# Altium PCB Machnguon24Vin12Vout.PcbDoc
Units mm, origin at the board's own origin, x right, y up, seen from the top; angles counter-clockwise.
Board outline 92.46 x 50.29 mm, 2 copper layers (Top Layer, Bottom Layer); 40 components, 21 nets, 97 pads, 43 vias.
Unrouted connection lines stored in the file: 56.
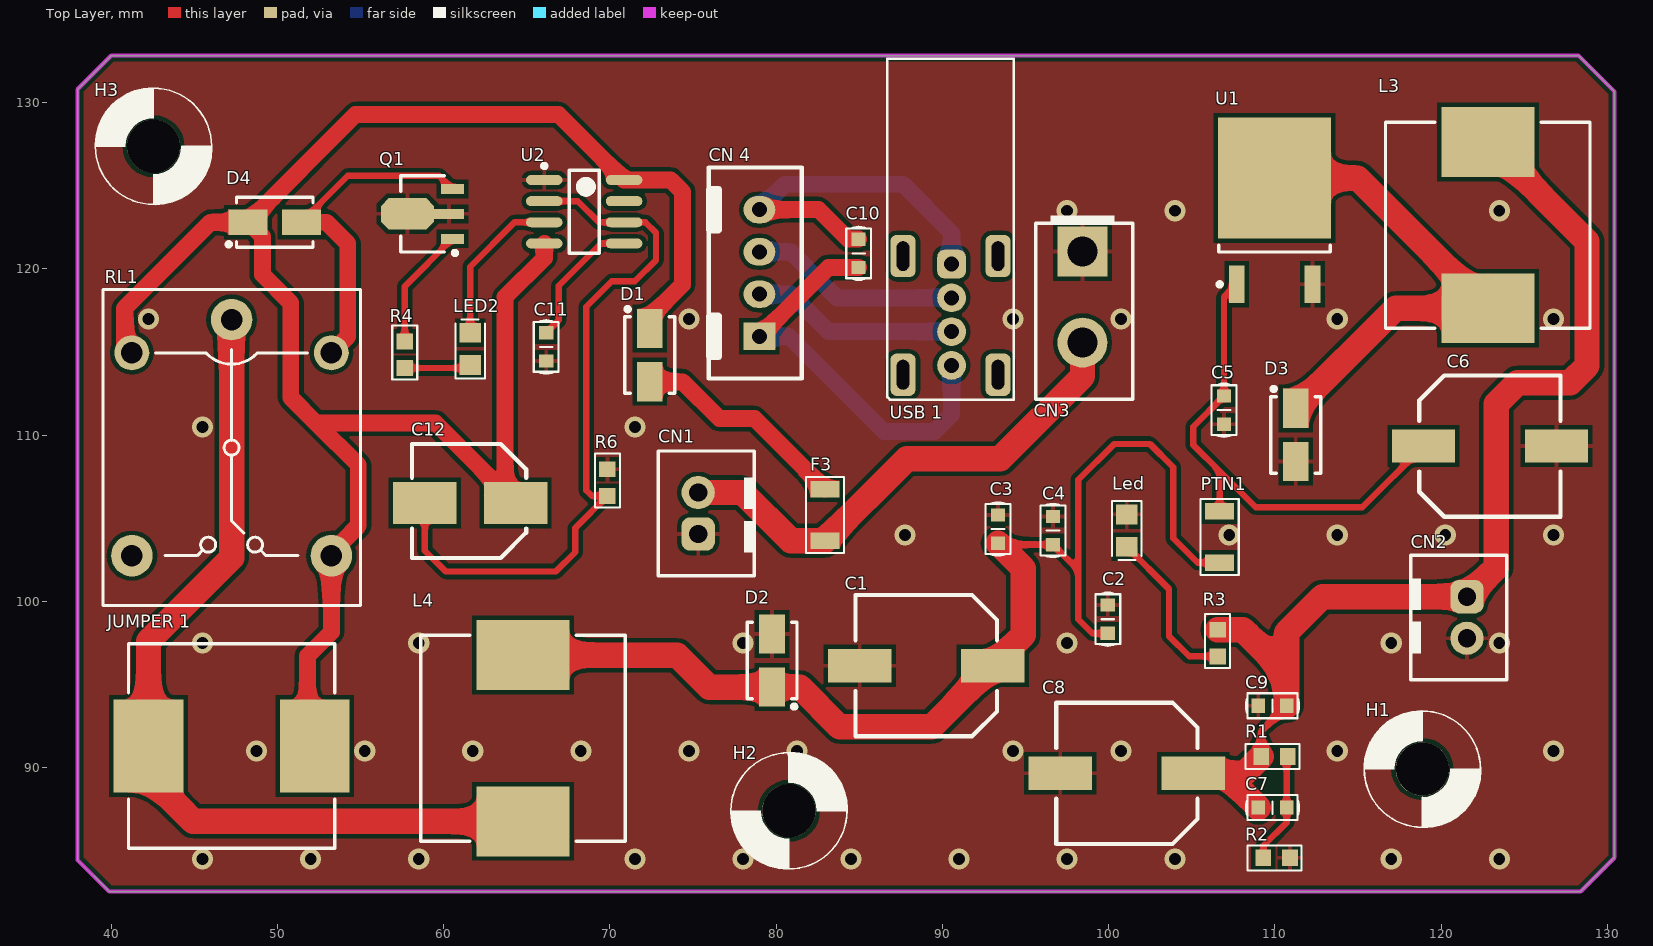
[diagram p0: Top Layer view]
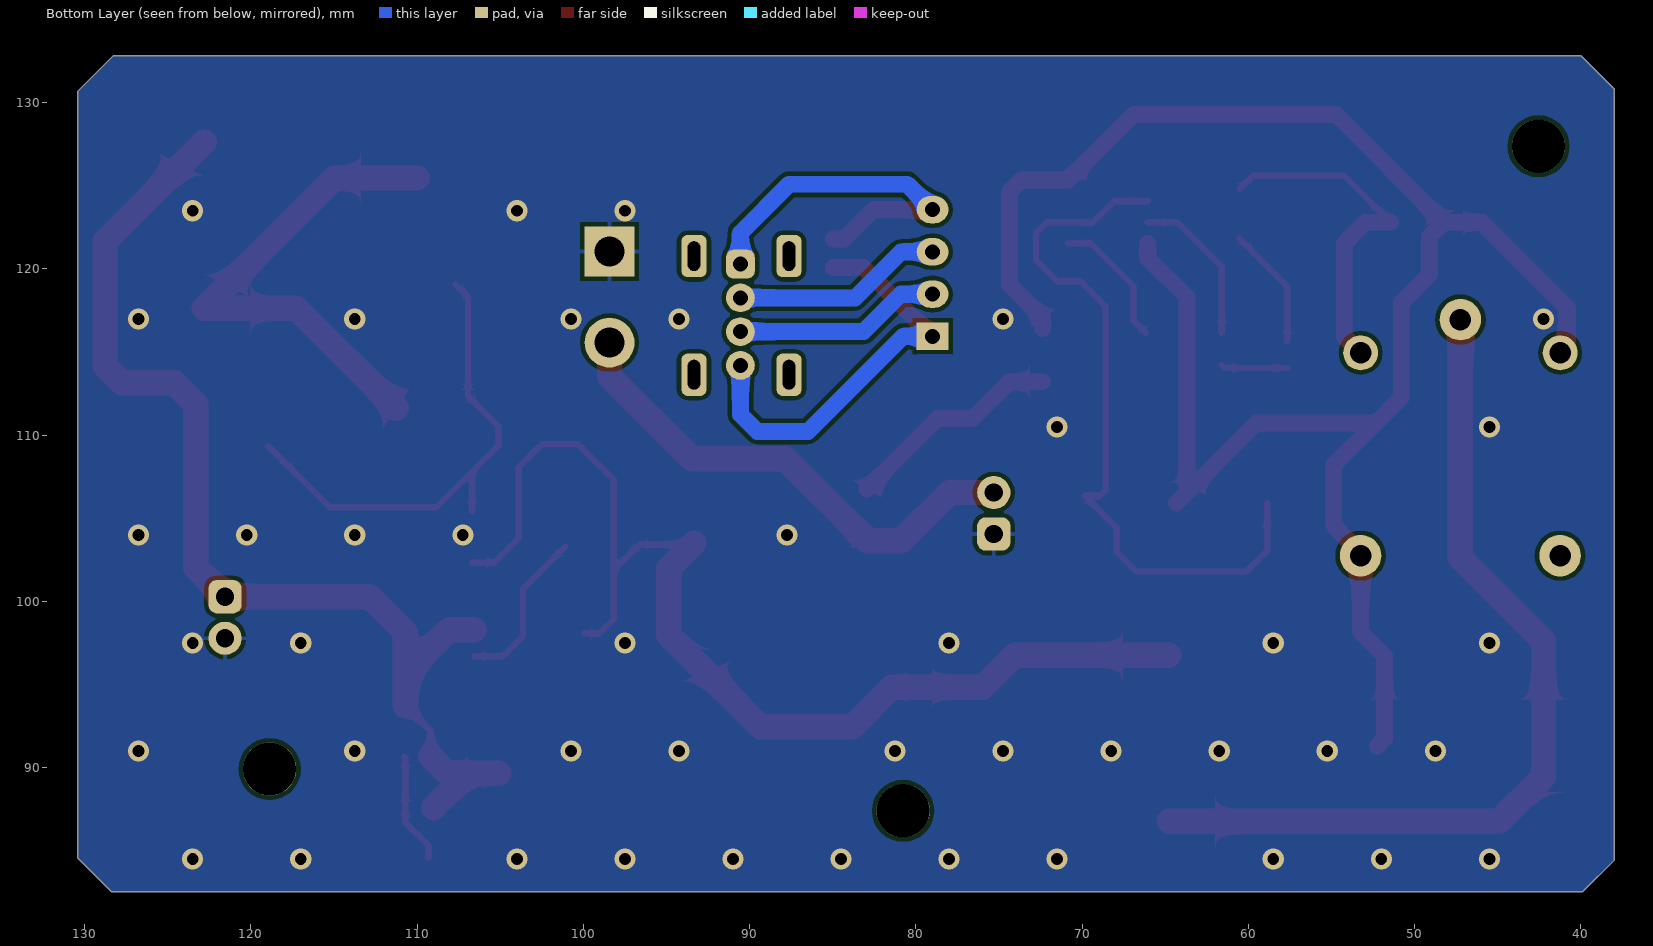
[diagram p1: Bottom Layer view, seen from below]
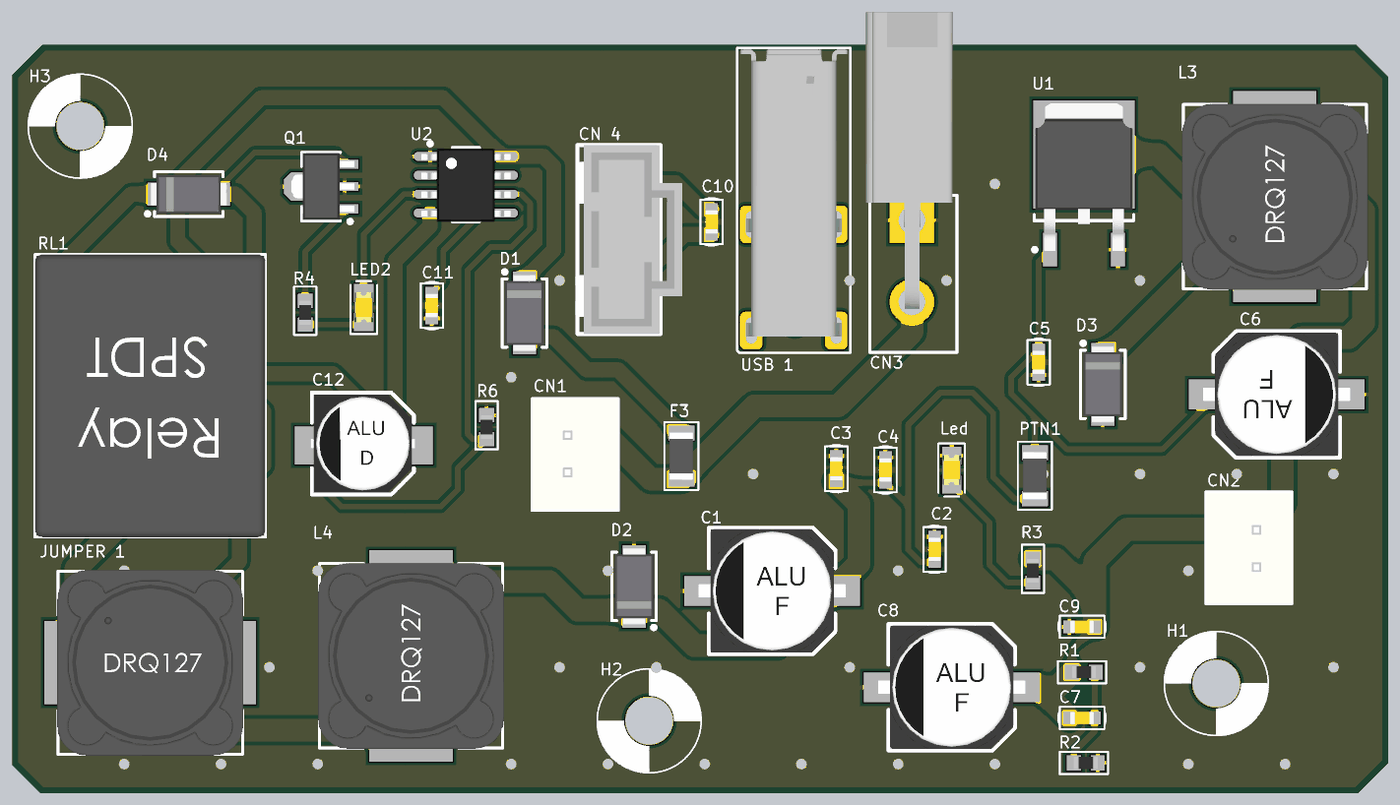
[diagram p2: 3D render of the assembled board from above, using the file's embedded part models]

## Layer stack, top to bottom
Top Solder: solder mask 0.0102, Solder Resist, Dk 3.5
Top Layer: signal copper 0.0356
Dielectric 1: dielectric 0.32, FR-4, Dk 4.8
Bottom Layer: signal copper 0.0356
Bottom Solder: solder mask 0.0102, Solder Resist, Dk 3.5

## Board outline
39.878,82.55 37.973,84.455 37.973,130.81 40.005,132.842 128.27,132.842 130.429,130.683 130.429,84.582 128.397,82.55

## Design rules (kind name [scope] priority, off if disabled: settings)
Clearance [All] p1: gap=0.254 ignorepadtopadclearanceinfootprint=FALSE except(0: Arc-Hole Track-Hole SMDPad-Hole THPad-Hole Via-Hole Fill-Hole Poly-Hole Region-Hole Text-Hole)
PolygonConnect [All] p1: connectstyle=Relief reliefconductorwidth=0.254 reliefentries=4 polygonreliefangle="90 Angle" airgapwidth=0.254
RoutingVias [All] p1: holewidth=0.711 width=1.27 viastyle="Through Hole" minholewidth=0.711 minwidth=1.27 maxholewidth=0.711 maxwidth=1.27
SolderMaskExpansion [All] p1: expansion=0.102
Width [All] p1: maxlimit=0.254 minlimit=0.254 preferedwidth=0.254
30 further rules are at their usual default settings.

## Components (designator, comment, footprint, x,y, rotation, side; value= is the part's Value field where it differs from the comment)
C1 "470/25" "C SMD ALU (F)" 89.027,96.139 r180 top
C2 "104/50V" "C 0603" 99.949,98.933 r90 top
C3 "102/50" "C 0603" 93.345,104.355 r90 top
C4 "10P/50V" "C 0603" 96.647,104.267 r90 top
C5 "104" "C 0603" 106.941,111.506 r270 top
C6 "470/25" "C SMD ALU (F)" 122.936,109.347 r0 top
C7 "104" "C 0603" 109.855,87.598 r0 top
C8 "220/25" "C SMD ALU (F)" 101.092,89.662 r180 top
C9 "104" "C 0603" 109.855,93.726 r180 top
C10 "104" "C 0603" 84.963,120.943 r90 top
C11 "102" "C 0603" 66.167,115.316 r270 top
C12 "47/25" "C SMD ALU (D)" 61.595,105.918 r180 top
CN1 "JP2" HDR/Header/2/BOX 76.211,105.153 r180 top value="Connector 2"
CN2 "JP2" HDR/Header/2/BOX 120.65,99.187 r0 top value="Connector 2"
CN3 "Header 2" HDR/5557/2.4 98.429,126.225 r90 top
"CN 4" "JP4" "HDR/Header/4 - WHITE" 81.109,119.244 r0 top value="Connector 4"
D1 "SS34" "DO-214AC (SMA)" 72.39,114.818 r90 top
D2 "4007" "DO-214AC (SMA)" 79.756,96.444 r270 top
D3 "SS34" "DO-214AC (SMA)" 111.252,110.021 r90 top
D4 "4007" "DO-214AC (SMA)" 49.835,122.809 r180 top
F3 "2A" "R 1206" 82.931,105.205 r90 top
H1 "3mm" SCREW/3/7/M 118.885,89.912 r0 top
H2 "3mm" SCREW/3/7/M 80.772,87.42 r90 top
H3 "3mm" SCREW/3/7/M 42.558,127.377 r0 top
"JUMPER 1" "Header 2" "Inductor SMD 12x12x8" 47.244,91.313 r0 top
L3 "47UH" "Inductor SMD 12x12x8" 122.809,122.635 r90 top
L4 "100UF" "Inductor SMD 12x12x8" 64.77,91.774 r90 top
Led "red" "Led 0805 Yellow" 101.092,104.267 r90 top
LED2 "Led" "Led 0805 Yellow - duplicate" 61.595,115.189 r270 top
PTN1 "1A/30v" "R 1206" 106.68,103.886 r90 top
Q1 "S8050" SOT-89 58.725,123.317 r180 top
R1 "13K" "R 0603" 109.728,90.424 r180 top
R2 "1k5" "R 0603" 109.855,84.328 r180 top
R3 "4K7" "R 0603" 106.303,97.748 r90 top
R4 "1K" "R 0603" 57.408,115.096 r90 top
R6 "22K" "R 0603" 69.6,107.4 r90 top
RL1 "Relay 10A/12V" RL_SPDT_10A 47.244,109.855 r270 top value="Relay SPDT, 10A, 12V"
U1 "DT1507" "TO-252 (DPAK)" 109.982,123.526 r90 top
U2 "LM555" SOIC-8 68.453,123.444 r0 top
"USB 1" "USB B" CONN/USB/B/19.5 90.572,120.227 r0 top

## Footprints (in the part's own frame and the unit in brackets; to place one, negate y for a bottom-side part, rotate by r counter-clockwise, add the part's x,y. Pads: shape width x height; smd on the part's side, far side on the other; paste and mask are expansions set on the pad)
"C 0603" [mm] "Chip Capacitor, 2-Leads, Body 1.6x0.8mm, IPC Medium Density"
  rect 0.8x0.85 smd: 1(-0.85,0) 2(0.85,0)
  silkscreen extent -1.6,-0.75 1.6,0.75, body extent -0.8,-0.43 0.8,0.43, height 0.81
"C SMD ALU (D)" [mil] "SMD Aluminum Electrolytic Capacitor, size D (6.3 x 5.4 mm)"
  rect 150x100 smd: 1(-107.5,0) 2(107.5,0)
  silkscreen extent -132,-140 138,130, body extent -135,-135 140,125, height 213
"C SMD ALU (F)" [mm] "SMD Aluminum Electrolytic Capacitor, size F (8.0 x 10.2 mm)"
  rect 3.81x2 smd: 1(-4,0) 2(4,0)
  silkscreen extent -4.25,-4.25 4.25,4.25, body extent -4.95,-4.15 4.95,4.15, height 10.2
CONN/USB/B/19.5 [mil]
  rrect50% 68x68 hole 35.43: 1(-0.82,2.67)
  round 68 hole 35.43: 2(-0.82,-77.33) 3(-0.82,-157.33) 4(-0.82,-237.33)
  rrect50% 60x100 hole 70 slot 30 at 0 deg: 5(-115.82,-259.33) 6(-115.82,21.67) 6(109.18,-259.33) 6(109.18,21.67)
  silkscreen extent -153,-318 146,489, body extent -145,-275 139,485, height 583
"DO-214AC (SMA)" [mm] "Molded Diode, 2-Leads, Body 4.3x2.7mm, IPC Medium Density"
  rect 2.35x1.55 smd: 1(-1.6,0) 2(1.6,0)
  silkscreen extent -2.3,-1.5 2.89,1.5, body extent -2.6,-1.3 2.6,1.3, height 2.4
HDR/5557/2.4 [mm]
  rect 3x3 hole 1.8: 1(-5.171,0.004)
  round 3 hole 1.8: 2(-10.655,0.004)
  silkscreen extent -14.05,-3.02 -3,2.82, body extent -14.99,-15.92 8.81,3.08, height 22.98
HDR/Header/2/BOX [mm]
  rrect50% 2x2 hole 1.1: 1(0.9,1.1)
  round 2 hole 1.1: 2(0.9,-1.4)
  silkscreen extent -2.5,-3.9 3.3,3.6, body extent -2.45,-3.9 3.3,3.5, height 7
"HDR/Header/4 - WHITE" [mm]
  rect 1.905x1.651 hole 0.9: 1(-2.115,-3.293)
  oval 1.905x1.651 hole 0.9: 2(-2.115,-0.753) 3(-2.115,1.787) 4(-2.115,4.327)
  silkscreen extent -5.3,-5.83 0.43,6.87, body extent -4.73,-5.83 1.87,6.87, height 12.32
"Inductor SMD 12x12x8" [mm] "Precision Wire Wound Inductor, 2-Leads, Body 12.3x12.3mm, IPC Low Density"
  rect 4.2x5.6 smd: 1(-5,0) 2(5,0)
  silkscreen extent -6.2,-6.15 6.2,6.15, body extent -6.25,-6.25 6.25,6.25, height 8.01
"Led 0805 Yellow" [mm] "Led SMD 0805"
  rect 1.2x1.3 smd: 1(-0.975,0) 2(0.975,0)
  silkscreen extent -1.78,-0.89 1.78,0.89, body extent -1.01,-0.62 1.01,0.63, height 1.1
"Led 0805 Yellow - duplicate" [mm] "Led SMD 0805"
  rect 1.2x1.3 smd: 1(-0.975,0) 2(0.975,0)
  silkscreen extent -1.78,-0.89 1.78,0.89, body extent -1.01,-0.62 1.01,0.63, height 1.1
"R 0603" [mm] "Chip Resistor, 2-Leads, Body 1.6x0.8mm, IPC Medium Density"
  rect 0.95x1 smd: 1(-1.05,-0.25) 2(0.55,-0.25)
  silkscreen extent -1.75,-1 1.5,0.5, body extent -1.05,-0.65 0.55,0.15, height 0.47
"R 1206" [mm] "Chip Resistor, 2-Leads, Body 3.1x1.6mm, IPC Medium Density"
  rect 1x1.75 smd: 1(-1.55,0) 2(1.55,0)
  silkscreen extent -2.29,-1.14 2.29,1.14, body extent -1.6,-0.8 1.6,0.8, height 0.6
RL_SPDT_10A [mm] "Relay SPDT, 5 pin, 10A,W 650mil, L 800mil, H 800mil"
  round 2.5 hole 1.3: 1(-7.1,0) 2(7.1,-6) 3(7.1,6)
  round 2.1 hole 1.3: 4(-5.1,-6) 5(-5.1,6)
  silkscreen extent -8.9,-7.75 10.1,7.75, body extent -8.9,-7.75 10.1,7.75, height 15.4
SCREW/3/7/M [mm]
  round 3.2 hole 3.2: 1(-0.013,0.004)
  silkscreen extent -3.54,-3.54 3.53,3.53
SOIC-8 [mm] "SOIC, 8-Leads, Body 5.0x4.0mm (max), Pitch 1.27mm, IPC Medium Density"
  oval 2.2x0.6 smd: 1(-2.4,1.905) 2(-2.4,0.635) 3(-2.4,-0.635) 4(-2.4,-1.905) 5(2.4,-1.905) 6(2.4,-0.635) 7(2.4,0.635) 8(2.4,1.905)
  silkscreen extent -2.52,-2.5 0.9,2.88, body extent -3,-2.49 3,2.41, height 1.75
SOT-89 [mm] "SOT89, 3-Leads, Body 4.5x2.4mm (max), Pitch 1.50mm, Lead Span 4.1mm, IPC Medium Density"
  rect 1.4x0.6 smd: 1(-1.8,1.5) 3(-1.8,-1.5)
  rect 1.8x0.6 smd: 2(-1.6,0)
  oct 3.2x1.9 smd: 2(0.9,0)
  silkscreen extent -2.07,-2.3 1.3,2.47, body extent -2.25,-2.26 2,2.24, height 1.54
"TO-252 (DPAK)" [mm] "D-PAK, 3-Pads, Body 6.2x6.7mm (max), IPC Medium Density"
  rect 2.25x0.95 smd: 1(-4.45,2.28) 3(-4.45,-2.28)
  rect 7.3x6.8 smd: 2(1.95,0)
  silkscreen extent -4.57,-3.35 -2.1,3.43, body extent -4.54,-3.27 5.4,3.27, height 2.41

## Part data
C1 C6 C8 C12: library part Capacitor, "Capacitor pol"
C2 C3 C4 C5 C7 C9 C10 C11: library part "Capacitor NP", "Capacitor non-pol"
CN1 CN2: library part Con2, "Connector 2"
CN3 "JUMPER 1": "Header, 2-Pin", LatestRevisionDate=17-Jul-2002, LatestRevisionNote="Re-released for DXP Platform.", Publisher="Altium Limited"
"CN 4": library part Con4, "Connector 4"
D1: library part "Diode Schottky", "Schottky", Code_JEDEC=DO-214-AA, LatestRevisionDate=17-Jul-2002, LatestRevisionNote="Re-released for DXP Platform.", PackageReference=SMB, Published=8-Jun-2000, Publisher="Altium Limited"
D2 D3 D4: library part "Diode Schottky", "Schottky Diode", Code_JEDEC=DO-214-AA, LatestRevisionDate=17-Jul-2002, LatestRevisionNote="Re-released for DXP Platform.", PackageReference=SMB, Published=8-Jun-2000, Publisher="Altium Limited"
F3 PTN1 R1 R2 R3 R4 R6: library part Resistor, "Resistor", LatestRevisionDate=17-Jul-2002, LatestRevisionNote="Re-released for DXP Platform.", PackageReference=AXIAL-0.3, Published=8-Jun-2000, Publisher="Altium Limited"
H1 H2 H3: library part Screw
L3 L4: library part Inductor, "Inductor"
Led: library part Led, "Typical LED"
LED2: "Typical LED"
Q1: library part "Transistor NPN - S8050", "Transistor NPN - S8050-40V,1.5A"
RL1: library part "Relay 1", "Relay SPDT,10A - 12VDC 5 Pin", ="Relay SPDT, 10A, 24V"
U1: "2.5A 150KHz 40V Buck DC to DC Converter"
U2: "Linear Voltage Regulator IC Positive Adjustable 1 Output 2 V ~ 37 V 150mA"
"USB 1": library part "CON USB B 19.5", "USB type B, 4 pins CON USB B 19.5"

## Via types
v1: diameter 1.27, hole 0.711, Top Layer to Bottom Layer, tented both sides, 43 vias

## Nets (pads, with @x,y where several pads share a name; then routed paths per layer and width w, separated by ;. In a path a pad name is that pad's centre, name@x,y a point inside that pad or via, vN(x,y) a via of type N, cw(c..) or ccw(c..) an arc to the next point about the centre after c; other vN are vias at no path point)
"12V IN": "JUMPER 1.1" L4.1 RL1.1 | length 53.2
  Top Layer w1.524: RL1.1 47.244,102.616 42.244,97.616 42.244,91.313 42.244,89.455 44.925,86.774 L4.1
"12V OUT": "JUMPER 1.2" C12.1 D1.2 D4.2 RL1.3 RL1.4 U2.4 U2.8 | length 118
  Top Layer w1.016: RL1.4 40.805,115.394 40.805,117.64 45.974,122.809 D4.2 ; 52.244,91.313 51.805,91.752 51.805,96.716 53.244,98.155 RL1.3 ; RL1.3@53.06,102.755 54.864,104.559 54.864,108.204 52.33,110.738 ; C12.1 C12.1@63.696,106.548 ; U2.4 66.053,120.663 63.696,118.306 C12.1@63.696,106.548 ; D1.2 72.39,117.094 74.364,119.068 74.364,124.645 73.66,125.349 U2.8 66.916,129.286 54.705,129.286 48.231,122.813 D4.2 ; D4.2 48.235,122.802 49.091,121.946 49.091,119.667 50.8,117.958 50.8,112.268 52.33,110.738 ; 52.33,110.738 52.336,110.744 59.499,110.744 C12.1@63.696,106.548
GND: C1.2 C2.2 C3.2 C4.2 C5.2 C6.2 C8.2 C9.2 C11.2 CN1.1 CN2.2 CN3.1 D2.1 D3.1 Led.2 Q1.2 R2.1 R6.2 U1.3 U2.1
  other v1: 45.5,84.5 52,84.5 58.5,84.5 71.5,84.5 78,84.5 84.5,84.5 91,84.5 97.5,84.5 104,84.5 117,84.5 123.5,84.5 48.75,91 55.25,91 61.75,91 68.25,91 74.75,91 81.25,91 94.25,91 100.75,91 113.75,91 126.75,91 45.5,97.5 58.5,97.5 78,97.5 97.5,97.5 117,97.5 123.5,97.5 87.75,104 107.25,104 113.75,104 120.25,104 126.75,104 45.5,110.5 71.5,110.5 42.25,117 74.75,117 94.25,117 100.75,117 113.75,117 126.75,117 97.5,123.5 104,123.5 123.5,123.5
NetC1_1: C1.1 C2.1 C3.1 C4.1 D2.2 L4.2 PTN1.1 | length 71.1
  Top Layer w0.381: C3.1@93.433,103.417 C4.1 98.171,101.893 ; C2.1 99.021,98.083 98.171,98.933 98.171,101.893 ; PTN1.1 105.35,102.336 103.886,103.8 103.886,108.077 102.489,109.474 100.33,109.474 98.171,107.315 98.171,101.893
  Top Layer w1.524: L4.2 74.041,96.774 75.971,94.844 D2.2 81.432,94.844 83.82,92.456 89.344,92.456 C1.1 94.869,97.981 94.869,101.981 93.433,103.417 C3.1
NetC5_1: C5.1 C6.1 PTN1.2 U1.1 | length 30.1
  Top Layer w0.381: PTN1.2 106.68,107.823 ; U1.1 106.941,118.315 C5.1 105.092,110.507 105.092,109.411 106.68,107.823 ; C6.1 115.253,105.664 108.839,105.664 106.68,107.823
NetC7_1: C7.1 C8.1 C9.1 CN2.1 L3.2 R1.2 R3.2 | length 67.2
  Top Layer w0.381: R1.2 109.178,92.199 C9.1
  Top Layer w1.524: C8.1 C8.1@106.941,89.662 ; R3.2 108.077,98.298 110.705,95.67 ; C7.1 C8.1@106.941,89.662 ; R1.2 108.166,89.662 C8.1@106.941,89.662 ; C9.1 110.705,95.67 ; L3.2 128.778,121.666 128.778,114.173 127.762,113.157 124.587,113.157 123.317,111.887 123.317,102.054 CN2.1 112.86,100.287 110.705,98.132 110.705,95.67
NetC7_2: C7.2 R1.1 R2.2 | length 6.7
  Top Layer w0.381: R2.2 109.305,85.302 110.705,86.702 C7.2 110.705,90.601 R1.1
NetC10_1: "CN 4.1" "USB 1.4" C10.1 | length 25
  Top Layer w1.016: 78.994,115.951 83.136,120.093 C10.1
  Bottom Layer w1.016: 78.994,115.951 80.772,115.951 86.487,110.236 89.535,110.236 90.551,111.252 90.551,114.198
NetC10_2: "CN 4.4" "USB 1.1" C10.2 | length 22
  Top Layer w1.016: 78.994,123.571 82.55,123.571 84.328,121.793 C10.2
  Bottom Layer w1.016: 78.994,123.571 80.518,125.095 87.63,125.095 90.551,122.174 90.551,120.294
NetC11_1: C11.1 U2.5 | length 8.1
  Top Layer w0.381: C11.1 66.929,116.928 66.929,118.999 69.469,121.539 U2.5
NetC12_2: C12.2 R6.1 U2.2 U2.6 | length 44.1
  Top Layer w0.381: C12.2 58.864,103.06 60.122,101.803 66.751,101.803 67.92,102.972 67.92,104.419 R6.1 68.91,106.35 68.58,106.68 68.58,117.729 70.104,119.253 71.501,119.253 72.771,120.523 72.771,122.174 72.136,122.809 U2.6 69.342,122.809 68.072,124.079 U2.2
NetCN1_2: CN1.2 CN3.2 F3.1 | length 30.4
  Top Layer w1.524: CN1.2 77.978,106.553 80.876,103.655 F3.1 87.861,108.585 93.472,108.585 98.425,113.538 CN3.2
"NetCN 4_2": "CN 4.2" "USB 1.3" | length 12.5
  Bottom Layer w1.016: 78.994,118.491 80.899,118.491 83.16,116.23 90.551,116.23
"NetCN 4_3": "CN 4.3" "USB 1.2" | length 12.7
  Bottom Layer w1.016: 78.994,121.031 80.899,121.031 83.668,118.262 90.551,118.262
NetD1_1: D1.1 F3.2 | length 13.2
  Top Layer w1.016: D1.1 74.361,113.218 76.581,110.998 78.688,110.998 F3.2
NetD3_2: D3.2 L3.1 U1.2 | length 30.1
  Top Layer w1.524: U1.2 114.968,125.476 L3.1 117.266,117.635 D3.2
NetD4_1: D4.1 Q1.3 RL1.5 | length 20.9
  Top Layer w0.381: D4.1 54.229,125.603 59.739,125.603 Q1.3
  Top Layer w1.016: D4.1 52.959,122.809 54.229,121.539 54.229,115.94 RL1.5
NetLED2_1: LED2.1 U2.3 | length 9.5
  Top Layer w0.381: LED2.1 61.595,120.142 64.262,122.809 U2.3
NetLED2_2: LED2.2 R4.1 | length 4
  Top Layer w0.381: R4.1 61.427,114.046 LED2.2
NetLed_1: Led.1 R3.1 | length 9.9
  Top Layer w0.381: Led.1 103.632,100.752 103.632,97.917 104.851,96.698 R3.1
NetQ1_1: Q1.1 R4.2 | length 7.4
  Top Layer w0.381: R4.2 57.658,118.95 Q1.1
pads on no net: "USB 1.5" "USB 1.6" H1.1 H2.1 H3.1 RL1.2 U2.7

## Polygon pours and split planes (outlines as drawn)
GND on Top Layer "GND_L01_P008" (solid, pour order 8): 37.973,130.81 40.005,132.842 128.27,132.842 130.429,130.683 130.429,84.582 128.397,82.55 39.878,82.55 37.973,84.455
GND on Bottom Layer "GND_L02_P010" (solid, pour order 10): 37.973,130.81 40.005,132.842 128.27,132.842 130.429,130.683 130.429,84.582 128.397,82.55 39.878,82.55 37.973,84.455

## Keep-outs
Top Layer:
  lines w0.254: 37.973,84.455 39.878,82.55 127.127,82.55 128.397,82.55 130.429,84.582 130.429,130.683 128.27,132.842 40.005,132.842 37.973,130.81 37.973,84.455